# Altium PCB Battery_Monitor.pcbdoc
Units mil, origin at the board's own origin, x right, y up, seen from the top; angles counter-clockwise.
Board outline 2999.98 x 2333.64 mil, 2 copper layers (Top Layer, Bottom Layer); 25 components, 23 nets, 86 pads, 4 vias.
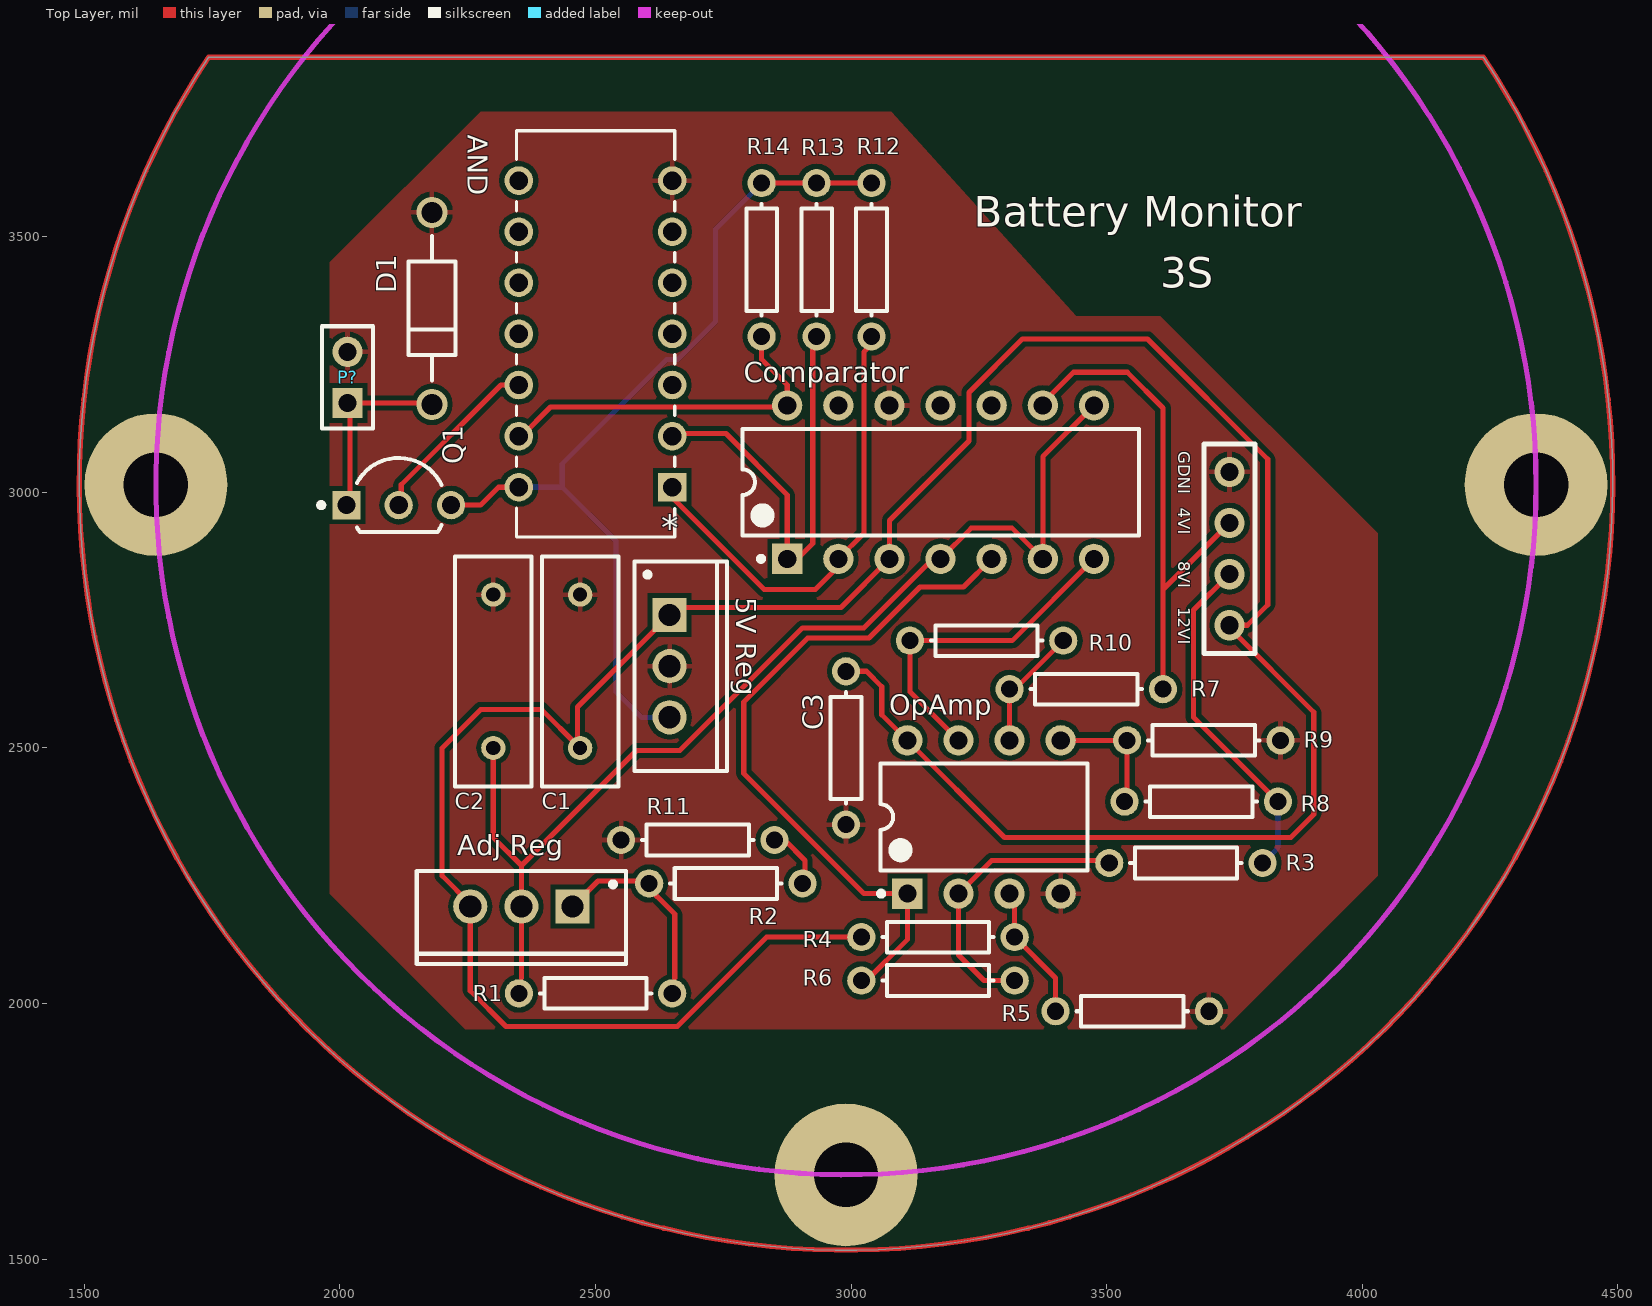
[diagram p0: Top Layer view]
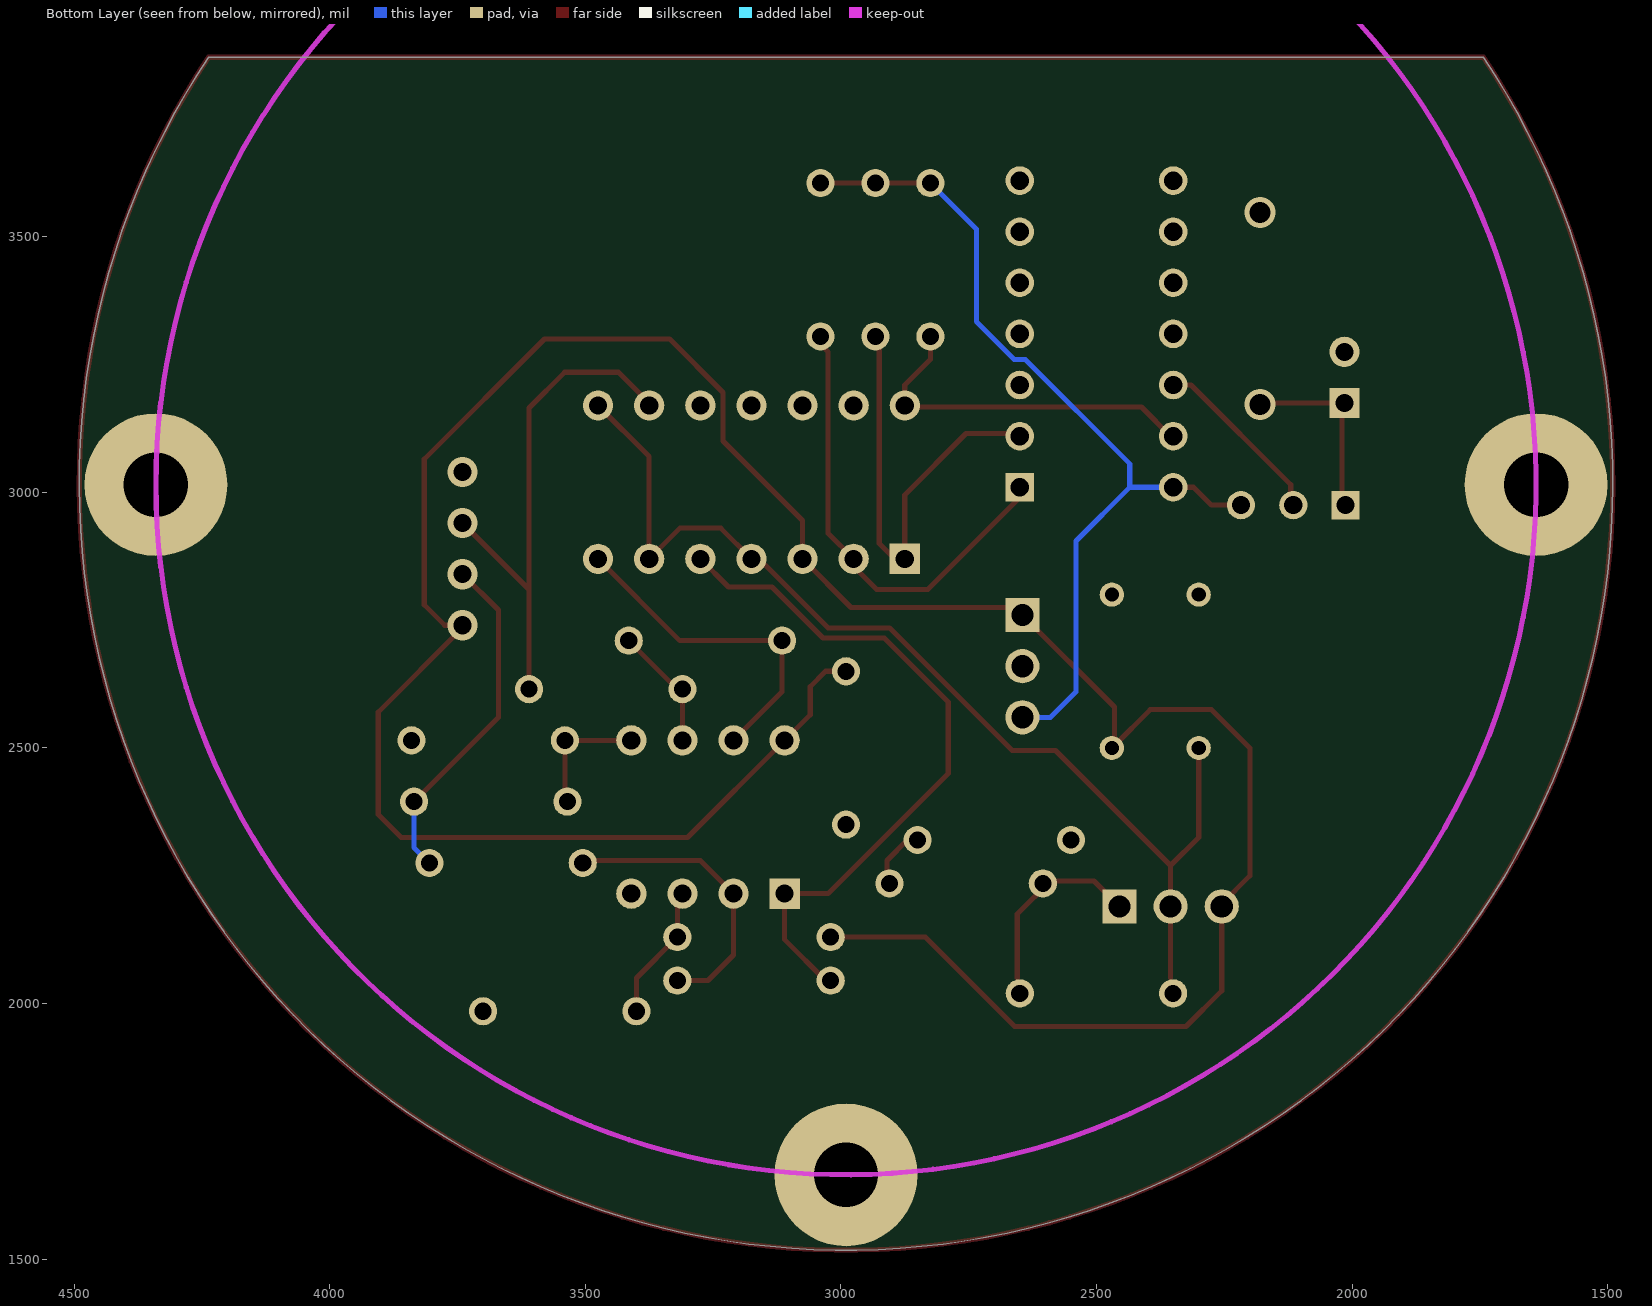
[diagram p1: Bottom Layer view, seen from below]

## Layer stack, top to bottom
Top Solder: solder mask 0.4, Solder Resist, Dk 3.5
Top Layer: signal copper 1.4
Dielectric 1: dielectric 12.6, FR-4, Dk 4.8
Bottom Layer: signal copper 1.4
Bottom Solder: solder mask 0.4, Solder Resist, Dk 3.5

## Board outline
1743.09,3851.28 ccw(c2990,3017.49) 4236.91,3851.28

## Design rules (kind name [scope] priority, off if disabled: settings)
Clearance [All] p1: gap=10 ignorepadtopadclearanceinfootprint=FALSE except(0: Arc-Hole Track-Hole SMDPad-Hole THPad-Hole Via-Hole Fill-Hole Poly-Hole Region-Hole Text-Hole)
PolygonConnect [All] p1: connectstyle=Relief reliefconductorwidth=10 reliefentries=4 polygonreliefangle="90 Angle" airgapwidth=10
RoomDefinition Battery_Monitor [InComponentClass('Battery_Monitor')] p1: confinementstyle=ConfineIn formatcopy=TRUE lockcomponents=FALSE outline 5245,3995 4300,3995 4300,4820 5245,4820
RoutingVias [All] p1: holewidth=28 width=50 viastyle="Through Hole" minholewidth=28 minwidth=50 maxholewidth=28 maxwidth=50
SolderMaskExpansion [All] p1: expansion=4
Width [All] p1: maxlimit=10 minlimit=10 preferedwidth=10
30 further rules are at their usual default settings.

## Components (designator, comment, footprint, x,y, rotation, side; value= is the part's Value field where it differs from the comment)
"5V Reg" "L7805ABV" TO220 2645,2660 r270 top
"Adj Reg" "LM317T" TO-220 2355,2190 r180 top
AND "SN54HC11J" J14 2350,3610 r180 top value=Value
C1 "Cap" RAD-0.3 2470,2650 r270 top value=100pF
C2 "Cap" RAD-0.3 2300,2650 r90 top value=100pF
C3 "Res1" AXIAL-0.3 2990,2500 r90 top value=100uF
Comparator "LM339N" N14A 3175,3020 r90 top
D1 "1N4002" ONSC-AXIAL_LEAD-2-59-10_P 2180,3360 r90 top
OpAmp "LMC662" N08E 3260,2365 r90 top
P? "Relay" HDR1X2 2015,3175 r90 top
Q1 "PN2222ARLRA" ONSC-TO-92-3-29-11_AM_BL 2115,2975 r0 top
R1 "Res1" AXIAL-0.3 2500,2020 r180 top value=1K
R2 "Res1" AXIAL-0.3 2755,2235 r180 top value=1K
R3 "Res1" AXIAL-0.3 3655,2275 r180 top value=1K
R4 "Res1" AXIAL-0.3 3170,2130 r0 top value=1K
R5 "Res1" AXIAL-0.3 3550,1985 r180 top value=1K
R6 "Res1" AXIAL-0.3 3170,2045 r180 top value=1K
R7 "Res1" AXIAL-0.3 3460,2615 r180 top value=1K
R8 "Res1" AXIAL-0.3 3685,2395 r180 top value=1K
R9 "Res1" AXIAL-0.3 3690,2515 r180 top value=1K
R10 "Res1" AXIAL-0.3 3265,2710 r180 top value=1K
R11 "Res1" AXIAL-0.3 2700,2320 r0 top value=1K
R12 "Res1" AXIAL-0.3 3040,3455 r90 top value=47K
R13 "Res1" AXIAL-0.3 2932.5,3455 r90 top value=47K
R14 "Res1" AXIAL-0.3 2825,3455 r90 top value=47K

## Footprints (in the part's own frame and the unit in brackets; to place one, negate y for a bottom-side part, rotate by r counter-clockwise, add the part's x,y. Pads: shape width x height; smd on the part's side, far side on the other; paste and mask are expansions set on the pad)
AXIAL-0.3 [mm] "Axial Device, Thru-Hole; 2 Leads; 0.3 in Pin Spacing"
  round 1.4 hole 0.85: 1(-3.81,0) 2(3.81,0)
  silkscreen extent -2.77,-0.76 2.77,0.76
HDR1X2 [mm] "Connector; Header; 2 Position"
  rect 1.5x1.5 hole 0.9: 1(0,0)
  round 1.5 hole 0.9: 2(2.54,0)
  silkscreen extent -1.27,-1.27 3.81,1.27
J14 [mil]
  rect 56x56 hole 36 mask+0: 1(-300,600)
  round 56 hole 36 mask+0: 2(-300,500) 3(-300,400) 4(-300,300) 5(-300,200) 6(-300,100) 7(-300,0) 8(0,0) 9(0,100) 10(0,200) 11(0,300) 12(0,400) 13(0,500) 14(0,600)
  silkscreen extent -305,-98 5,698, body extent 0,0 10,10, height 10
N08E [mm] "DIP, 8-Pin, Row Spacing 7.62 mm, Pitch 2.54 mm"
  rect 1.5x1.5 hole 0.9: 1(-3.81,3.81)
  round 1.5 hole 0.9: 2(-3.81,1.27) 3(-3.81,-1.27) 4(-3.81,-3.81) 5(3.81,-3.81) 6(3.81,-1.27) 7(3.81,1.27) 8(3.81,3.81)
  silkscreen extent -3.93,-5.15 2.65,5.23, body extent -3.6,-5.15 3.6,5.15, height 5.34
N14A [mm] "DIP, 14-Pin, Row Spacing 7.62 mm, Pitch 2.54 mm"
  rect 1.5x1.5 hole 0.9: 1(-3.81,7.62)
  round 1.5 hole 0.9: 2(-3.81,5.08) 3(-3.81,2.54) 4(-3.81,0) 5(-3.81,-2.54) 6(-3.81,-5.08) 7(-3.81,-7.62) 8(3.81,-7.62) 9(3.81,-5.08) 10(3.81,-2.54) 11(3.81,0) 12(3.81,2.54) 13(3.81,5.08) 14(3.81,7.62)
  silkscreen extent -3.93,-9.85 2.65,9.85, body extent -3.55,-9.85 3.55,9.85, height 5.08
ONSC-AXIAL_LEAD-2-59-10_P [mm] "AXIAL, 2-Leads, Diameter 2.35mm"
  round 1.55 hole 1.05: 1(-4.77,0) 2(4.77,0)
  silkscreen extent -3.59,-1.17 3.59,1.17
ONSC-TO-92-3-29-11_AM_BL [mm] "TO, 3-Leads, Body Dia 4.7mm, Pitch 2.6mm"
  rect 1.4x1.4 hole 0.9: 1(-2.6,0)
  round 1.4 hole 0.9: 2(0,0) 3(2.6,0)
  silkscreen extent -3.97,-1.34 2.13,2.35, body extent -2.84,-1.34 2.84,2.35, height 8.92
RAD-0.3 [mm] "Radial Cap, Thru-Hole; 2 Leads; 0.3 in Pin Spacing"
  round 1.2 hole 0.7: 1(-3.81,0) 2(3.81,0)
  silkscreen extent -5.71,-1.91 5.71,1.91
TO220 [mm] "TO, Thru-Hole, Vertical, Heatsink Mounted; 3 In-Line Leads; Pitch 2.54 mm"
  rect 1.7x1.7 hole 1.1: 1(-2.54,0)
  round 1.7 hole 1.1: 2(0,0) 3(2.54,0)
  silkscreen extent -5.2,-1.75 5.2,2.85, body extent -5.25,-1.8 5.25,2.9, height 19.7
TO-220 [mm] "TO, Thru-Hole, Vertical, Heatsink Mounted; 3 In-Line Leads; Pitch 2.54 mm"
  rect 1.7x1.7 hole 1.1: 1(-2.54,0)
  round 1.7 hole 1.1: 2(0,0) 3(2.54,0)
  silkscreen extent -5.2,-1.75 5.2,2.85, body extent -5.25,-1.8 5.25,2.9, height 19.7

## Part data
"5V Reg": "Positive Voltage Regulator, 5V, 3-Pin TO-220", ComponentLink1Description="Manufacturer URL", ComponentLink1URL=http://www.st.com, ComponentLink2Description=Datasheet, ComponentLink2URL=http://www.st.com/internet/com/TECHNICAL_RESOURCES/TECHNICAL_LITERATURE/DATASHEET/CD00000444.pdf, ComponentLink3Description="Package Specification", ComponentLink3URL=http://www.st.com/internet/com/TECHNICAL_RESOURCES/TECHNICAL_LITERATURE/PACKAGE_INFORMATION/CD00004649.pdf, DatasheetVersion=Nov-2011, PackageDescription="TO, Thru-Hole, Vertical, Heatsink Mounted; 3 In-Line Leads; Pitch 2.54 mm", PackageReference=TO220, PackageVersion=ver3.0, PartNumber=L7805ABV
"Adj Reg": "1.5A, 1.2V to 37V Adjustable Voltage Regulator, 3-Pin TO-220", ComponentLink1Description="Manufacturer URL", ComponentLink1URL=http://www.st.com, ComponentLink2Description=Datasheet, ComponentLink2URL=http://www.st.com/internet/com/TECHNICAL_RESOURCES/TECHNICAL_LITERATURE/DATASHEET/CD00000455.pdf, ComponentLink3Description="Package Specification", ComponentLink3URL=http://www.st.com/internet/com/TECHNICAL_RESOURCES/TECHNICAL_LITERATURE/PACKAGE_INFORMATION/CD00004649.pdf, DatasheetVersion=Nov-2011, PackageDescription="TO, Thru-Hole, Vertical, Heatsink Mounted; 3 In-Line Leads; Pitch 2.54 mm", PackageReference=TO-220, PackageVersion=2011, PartNumber=LM317T
AND: "No Description Available", Built_By=EMA_UL_Team, Copyright="Copyright (C) 2018 Accelerated Designs. All rights reserved", Manufacturer_Part_Number=SN54HC11J, RefDes=RefDes, Type=DEV, Vendor="Texas Instruments"
C1 C2: "Capacitor", LatestRevisionDate=17-Jul-2002, LatestRevisionNote="Re-released for DXP Platform.", PackageDescription="Radial Cap, Thru-Hole; 2 Leads; 0.3 in Pin Spacing", PackageReference=RAD-0.3, Published=8-Jun-2000, Publisher="Altium Limited"
C3 R1 R2 R3 R4 R5 R6 R7 R8 R9 R10 R11 R12 R13 R14: "Resistor", LatestRevisionDate=17-Jul-2002, LatestRevisionNote="Re-released for DXP Platform.", PackageDescription="Axial Device, Thru-Hole; 2 Leads; 0.3 in Pin Spacing", PackageReference=AXIAL-0.3, Published=8-Jun-2000, Publisher="Altium Limited"
Comparator: "Low Power Low Offset Voltage Quad Comparator, 14-pin MDIP", Manufacturer="National Semiconductor", PackageTopMarking=NSUZXYYTTE#*LM339N, PowerWise=N, Code_JEDEC=MS-001-AA, ComponentLink1Description="Manufacturer URL", ComponentLink1URL=http://www.national.com/, ComponentLink2Description="LM339 Datasheet", ComponentLink2URL=http://www.national.com/ds/LM/LM339.pdf, ComponentLink3Description="LM339 Web Page", ComponentLink3URL=http://www.national.com/pf/LM/LM339.html, ComponentLink4Description="N14A Package Page", ComponentLink4URL=http://www.national.com/packaging/folders/n14a.html, CompType=Amplifiers, DatasheetVersion=Mar-2004, High-Reliability=Y, PackageDescription="MDIP, .750 x .250 x.130in, 14 Lead, .100in Pitch", PackageReference=N14A, PackageVersion="revG, May-2006", PartNumber=LM339N, PinCount=14, RoHS=N
D1: "Standard Recovery Rectifier, 2-Pin Axial_Lead, Pb-Free, Bulk Bag", Manufacturer="On Semiconductor", Supplier Part Number 1=1N4002OS-ND, ComponentLink1Description="Manufacturer URL", ComponentLink1URL=http://www.onsemi.com/, ComponentLink2Description=Datasheet, ComponentLink2URL=http://www.onsemi.com/pub_link/Collateral/1N4001-D.PDF, ComponentLink3Description="Package Specification", ComponentLink3URL=http://www.onsemi.cn/pub_link/Collateral/59-10.PDF, DatasheetVersion="Rev. 13", IFSM Max (A)=30, IO(rec) Max (A)=1, Mounting Technology="Through Hole", PackageDescription="2-Pin, Axial Lead, Diameter 2.35 mm", PackageReference=AXIAL_LEAD-2-59-10, PackageVersion="Rev. U, 02/2005", Packing="Bulk Bag", PartNumber=1N4002, RoHS=TRUE, Supplier 1=Digi-Key, Type="Standard Recovery", VRRM Max (V)=100
OpAmp: library part LMC662AIN, "CMOS Dual Operational Amplifier, 8-pin MDIP", Manufacturer="National Semiconductor", PackageTopMarking=NSUZXYTTE#*LMC*662AIN, PowerWise=N, Code_JEDEC=MS-001-BA, ComponentLink1Description="Manufacturer URL", ComponentLink1URL=http://www.national.com/, ComponentLink2Description="LMC662 Datasheet", ComponentLink2URL=http://www.national.com/ds/LM/LMC662.pdf, ComponentLink3Description="LMC662 Web Page", ComponentLink3URL=http://www.national.com/pf/LM/LMC662.html, ComponentLink4Description="N08E Package Page", ComponentLink4URL=http://www.national.com/packaging/folders/n08e.html, CompType=Amplifiers, DatasheetVersion=Apr-2003, High-Reliability=Y, PackageDescription="MDIP, .365 x .250 x .130in, 8 Lead, .100in Pitch", PackageReference=N08E, PackageVersion="revG, May-2006", PartNumber=LMC662AIN, PinCount=8, RoHS=N
P?: library part "Header 2", "Header, 2-Pin", LatestRevisionDate=17-Jul-2002, LatestRevisionNote="Re-released for DXP Platform.", Publisher="Altium Limited"
Q1: "General Purpose Transistor, NPN Silicon, 3-Pin TO-92, Tape and Reel", Manufacturer="On Semiconductor", Supplier Part Number 1=PN2222ARLRAOSCT-ND, ComponentLink1Description="Manufacturer URL", ComponentLink1URL=http://www.onsemi.com/, ComponentLink2Description=Datasheet, ComponentLink2URL=http://www.onsemi.com/pub_link/Collateral/PN2222-D.PDF, ComponentLink3Description="Package Specification", ComponentLink3URL=http://www.onsemi.com/pub_link/Collateral/MAC97-D.PDF, DatasheetVersion="Rev. 5", fT Min (MHz)=300, IC Continuous (A)=0.6, Mounting Technology="Through Hole", PackageDescription="3-Pin Transistor Outline, Body 4.825 x 3.685 mm, Pitch 1.27 mm", PackageReference=TO-92-3-29-11_AM_BL, PackageVersion="Rev. AM", Packing="Tape and Reel", PartNumber=PN2222ARLRA, Polarity=NPN, RoHS=FALSE, Supplier 1=Digi-Key

## Free pads (board coordinates)
  round 279.53 hole 125.98 unplated: 8(1640,3015) 8(2990,1665) 8(4340,3015)

## Via types
v1: diameter 59.06, hole 35.43, Top Layer to Bottom Layer, 4 vias

## Nets (pads, with @x,y where several pads share a name; then routed paths per layer and width w, separated by ;. In a path a pad name is that pad's centre, name@x,y a point inside that pad or via, vN(x,y) a via of type N, cw(c..) or ccw(c..) an arc to the next point about the centre after c; other vN are vias at no path point)
3.6V: "Adj Reg.2" C2.1 Comparator.4 Comparator.6 Comparator.8 R1.2 | length 2132.4
  Top Layer w10: C2.1 2300,2325 2355,2270 ; 2355,2050 2355,2190 2355,2270 ; Comparator.8 3375,3070 Comparator.6 3315,2930 3235,2930 Comparator.4 3160,2870 3025,2735 2905,2735 2665,2495 2580,2495 2355,2270
4VI: Comparator.9 R7.1 | length 1027.9
  Top Layer w10: Comparator.9 3375,3175 3435,3235 3540.16,3235 3610,3165.16 3610,2810 ; R7.1 3610,2810 ; v1(3740.16,2940) 3610.16,2810 3610,2810
4VO: 
5V: "5V Reg.3" AND.14 Q1.3 R12.2 R13.2 R14.2 | length 1762.9
  Top Layer w10: Q1.3@2240,2975 2275,2975 2310,3010 AND.14 ; R14.2 R13.2 R12.2
  Bottom Layer w10: AND.14 2435,3010 ; 2645,2560 2590,2560 2540,2610 2540,2905 2435,3010 ; R14.2 2735.09,3515.09 2735.09,3334.28 2660.81,3260 2639.19,3260 2435,3055.81 2435,3010
8VI: R3.1 R8.1 | length 674.8
  Top Layer w10: v1(3740.16,2840) 3670,2769.84 3670,2560 R8.1
  Bottom Layer w10: R3.1 3835,2305 R8.1
8VO: 
12I: "5V Reg.1" "Adj Reg.3" C1.2 C3.2 Comparator.3 OpAmp.8 R4.1 | length 5531.8
  Top Layer w10: C1.2@2465,2500 C1.2@2465,2505 ; C1.2 C1.2@2465,2505 ; C3.2 3030,2650 3060,2620 3060,2565 OpAmp.8 3300,2325 3860,2325 3905,2370 3905,2570 v1@3740,2735 ; R4.1 2835,2130 2660,1955 2325,1955 2255,2025 2255,2190 2255,2195 2200,2250 2200,2500 2275,2575 2395,2575 C1.2@2465,2505 ; v1(3740.16,2740) 3775,2740 3815,2780 3815,3065 3580,3300 3335,3300 3230.47,3195.47 3230.47,3100.47 3075,2945 Comparator.3 2980,2775 2660,2775 2645,2760 2465,2580 C1.2@2465,2505
12VO: 
AND_OUTPUT: AND.12 Q1.2 | length 355.8
  Top Layer w10: Q1.2@2120,2970 2120,3015 2315,3210 AND.12
CELL1: AND.13 Comparator.14 R14.1 | length 702.3
  Top Layer w10: AND.13@2355,3110 2412,3167 2875,3167 Comparator.14 2875,3210 2825,3260 R14.1
CELL2: AND.2 Comparator.1 R13.1 | length 870.2
  Top Layer w10: AND.2@2650,3115 2755,3115 2875,2995 Comparator.1 2895,2870 2925,2900 2925,3297.5 R13.1
CELL3: AND.1 Comparator.2 R12.1 | length 920.1
  Top Layer w10: AND.1@2650,3015 AND.1 2650,2990 2830,2810 2930,2810 2975,2855 Comparator.2 3025,2920 3025,3275 3040,3290 R12.1
GNDI: "5V Reg.2" AND.7 C1.1 C2.2 C3.1 Comparator.12 D1.2 OpAmp.4 P?.2 R5.1 R9.1 R11.1
  other v1: 3740.16,3040
GNDO: 
"NetAdj Reg_1": "Adj Reg.1" R1.1 R2.2 | length 365.6
  Top Layer w10: 2460,2195 2505,2240 2590,2240 2655,2175 2655,2050
NetComparator_5: Comparator.5 OpAmp.1 R6.2 | length 1371.5
  Top Layer w10: R6.2 3030,2045 3110,2125 OpAmp.1 3025,2215 2790,2450 2790,2590 2915,2715 3035,2715 3135,2815 3220,2815 Comparator.5
NetComparator_7: Comparator.7 OpAmp.7 R10.2 | length 660.6
  Top Layer w10: OpAmp.7 3115,2610 R10.2 3315,2710 Comparator.7
NetOpAmp_2: OpAmp.2 R3.2 R6.1 | length 574.7
  Top Layer w10: R6.1 3260,2045 3210,2095 OpAmp.2 3275,2280 3500,2280 R3.2
NetOpAmp_3: OpAmp.3 R4.2 R5.2 | length 282.3
  Top Layer w10: OpAmp.3 3320,2205 R4.2 3400,2050 R5.2 R5.2@3400,1970
NetOpAmp_5: OpAmp.5 R8.2 R9.2 | length 252.1
  Top Layer w10: OpAmp.5 R9.2 3540,2400 R8.2
NetOpAmp_6: OpAmp.6 R7.2 R10.1 | length 244.4
  Top Layer w10: OpAmp.6 R7.2 3320,2615 R10.1
NetR2_1: R2.1 R11.2 | length 131.6
  Top Layer w10: R11.2 2870,2320 2910,2280 R2.1@2910,2225
TO_RELAY: D1.1 P?.1 Q1.1 | length 371.2
  Top Layer w10: P?.1 P?.1@2020,3175 ; Q1.1@2020,2970 P?.1@2020,3175 ; D1.1 2177.2,3175 P?.1@2020,3175
pads on no net: AND.3 AND.4 AND.5 AND.6 AND.8 AND.9 AND.10 AND.11 Comparator.10 Comparator.11 Comparator.13
copper on no net: | length 8974.4
  Top Layer w10: 1743.09,3851.28 ccw(c2990,3017.49) 4236.91,3851.28 1743.09,3851.28

## Polygon pours and split planes (outlines as drawn)
GNDI on Top Layer "GND" (solid, pour order 0): 1980,3450 2275,3745 3078.1,3745 3440,3345 3605,3345 4030,2920 4030,2250 3730,1950 2245,1950 1980,2215

## Keep-outs
Keep-Out Layer:
  circle w10: c2990,3015 r1350

## Silkscreen, mask and mechanical layers (free items; w line width, h text height)
Top Overlay:
  lines w10: 3690,2685 3690,3095 3790,3095 3790,2685 3690,2685
  text "Battery Monitor" at 3240,3520 h60
  text "3S" at 3604.88,3400 h60
  text "GDNI" at 3640,3080 h23.62 r270
  text "4VI" at 3640,2970 h23.62 r270
  text "8VI" at 3640,2865 h23.62 r270
  text "12VI" at 3640,2775 h23.62 r270

## Text inside footprints (layer, text, board x,y; h text height)
AND: Top Overlay "*" at 2662.5,2977 h50 r180; Mechanical 13 "*" at 2652.5,3035 h50 r180